# Altium PCB sigcarrier.PcbDoc
Units mil, origin at the board's own origin, x right, y up, seen from the top; angles counter-clockwise.
Board outline 3267.72 x 2322.83 mil, 2 copper layers (Top Layer, Bottom Layer), stack 47.8 mil thick; 178 components, 282 nets, 680 pads, 1 vias.
Unrouted connection lines stored in the file: 421.
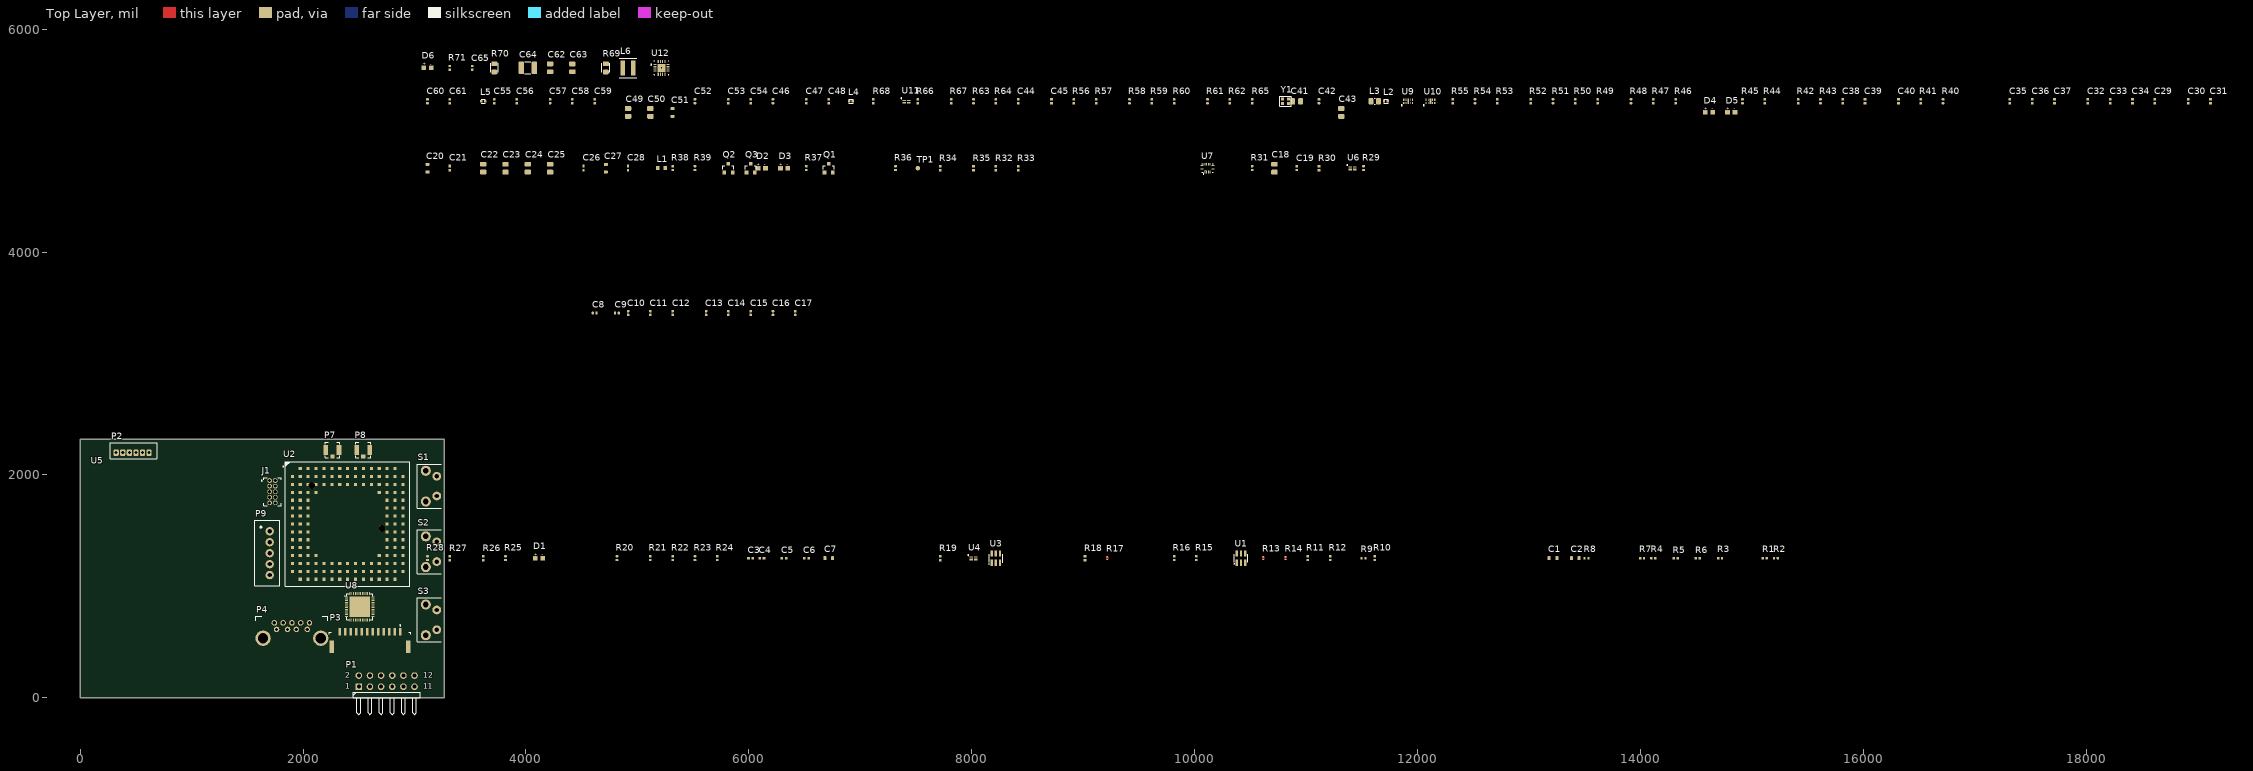
[diagram p0: Top Layer view]
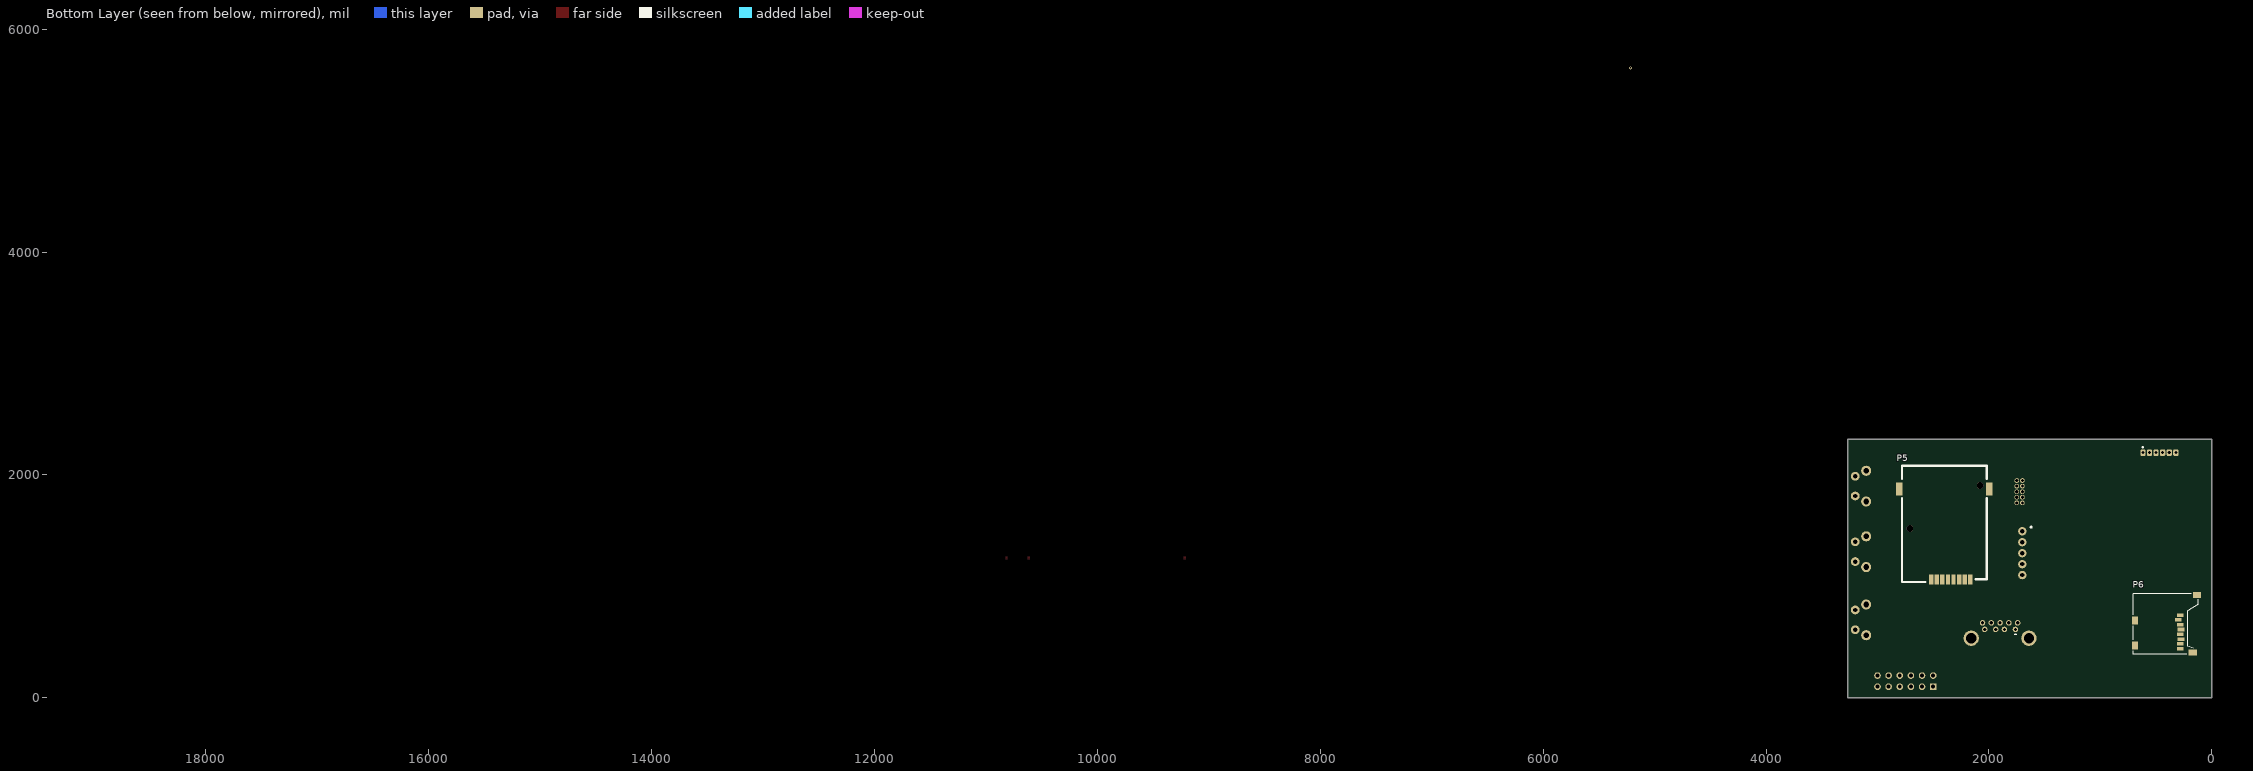
[diagram p1: Bottom Layer view, seen from below]

## Layer stack, top to bottom
Top Solder: solder mask 0.4, Solder Resist, Dk 3.5
Top Layer: signal copper 1.4
Dielectric1: core 45, FR-4, Dk 4.8
Bottom Layer: signal copper 1.4
Bottom Solder: solder mask 0.4, Solder Resist, Dk 3.5

## Board outline
0,0 3267.72,0 3267.72,2322.83 0,2322.83

## Design rules (kind name [scope] priority, off if disabled: settings)
Clearance [All] p1: gap=5 ignorepadtopadclearanceinfootprint=FALSE except(0: Arc-Hole Track-Hole SMDPad-Hole THPad-Hole Via-Hole Fill-Hole Poly-Hole Region-Hole Text-Hole)
ComponentClearance [All] p1 off: gap=10 collisioncheckmode=3 verticalgap=10 showdistances=FALSE
HoleSize [All] p1: absolutevalues=TRUE maxlimit=1000 minlimit=10 maxpercent=80.000 minpercent=20.000
PolygonConnect [All] p1: connectstyle=Direct reliefconductorwidth=10 reliefentries=4 polygonreliefangle="90 Angle" airgapwidth=10
RoutingVias [All] p1: holewidth=28 width=50 viastyle="Through Hole" minholewidth=28 minwidth=50 maxholewidth=28 maxwidth=50
SilkToSolderMaskClearance SilkscreenOverComponentPads [IsPad] p1: minsilkscreentomaskgap=10 clearancetoexposedcopper=TRUE
SolderMaskExpansion [All] p1: expansion=4
Width [All] p1: maxlimit=19685.04 minlimit=10 preferedwidth=10
27 further rules are at their usual default settings.

## Classes and differential pairs
net class USB: XUHOST1_DM XUHOST1_DP XUSB3_DM XUSB3_DP
net class RF: ANT_DIV ANTENNA
component class 05_power: C62 C63 C64 C65 D6 L6 R69 R70 R71 U12
component class 04_ethernet: C29 C30 C31 C32 C33 C34 C35 C36 C37 C38 C39 C40 C41 C42 C43 C44 C45 C46 C47 C48 C49 C50 C51 C52 C53 C54 C55 C56 C57 C58 C59 C60 C61 D4 D5 L2 L3 L4 L5 R40 R41 R42 R43 R44 R45 R46 R47 R48 R49 R50 R51 R52 R53 R54 R55 R56 R57 R58 R59 R60 R61 R62 R63 R64 R65 R66 R67 R68 T1 U8 U9 U10 U11 Y1
component class 03_cellular: C18 C19 C20 C21 C22 C23 C24 C25 C26 C27 C28 D2 D3 L1 P7 P8 Q1 Q2 Q3 R29 R30 R31 R32 R33 R34 R35 R36 R37 R38 R39 S3 TP1 U2 U6 U7
component class 02_som: C8 C9 C10 C11 C12 C13 C14 C15 C16 C17 U5
component class 01_main: C1 C2 C3 C4 C5 C6 C7 D1 J1 P1 P2 P3 P4 P5 P6 P9 R1 R2 R3 R4 R5 R6 R7 R8 R9 R10 R11 R12 R13 R14 R15 R16 R17 R18 R19 R20 R21 R22 R23 R24 R25 R26 R27 R28 S1 S2 U1 U3 U4

## Components (designator, comment, footprint, x,y, rotation, side; value= is the part's Value field where it differs from the comment)
C1 "C1608X7R1A105M080" CAPC160X80X90L20N 13216.53,1253.45 r0 top value=1uF
C2 "C1608X7R1A105M080" CAPC160X80X90L20N 13416.53,1253.45 r0 top value=1uF
C3 "CBR04C330F5GAC" 0402#1 6016.53,1253.45 r0 top value=33pF
C4 "CBR04C330F5GAC" 0402#1 6116.53,1253.45 r0 top value=33pF
C5 "CBR04C330F5GAC" 0402#1 6316.53,1253.45 r0 top value=33pF
C6 "CBR04C330F5GAC" 0402#1 6516.53,1253.45 r0 top value=33pF
C7 "C1608X7R1A225M080" CAPC160X80X90L20N 6716.53,1253.45 r0 top value=2.2uF
C8 "GCM155R71H104KE02" CAPC100X50X55L25N 4616.53,3453.45 r0 top value=100nF
C9 "GCM155R71H104KE02" CAPC100X50X55L25N 4816.53,3453.45 r0 top value=100nF
C10 "GCM155R71H104KE02" CAPC100X50X55L25N 4916.53,3453.45 r90 top value=100nF
C11 "GCM155R71H104KE02" CAPC100X50X55L25N 5116.53,3453.45 r90 top value=100nF
C12 "GCM155R71H104KE02" CAPC100X50X55L25N 5316.53,3453.45 r90 top value=100nF
C13 "GCM155R71H104KE02" CAPC100X50X55L25N 5616.53,3453.45 r90 top value=100nF
C14 "GCM155R71H104KE02" CAPC100X50X55L25N 5816.53,3453.45 r90 top value=100nF
C15 "GCM155R71H104KE02" CAPC100X50X55L25N 6016.53,3453.45 r90 top value=100nF
C16 "GCM155R71H104KE02" CAPC100X50X55L25N 6216.53,3453.45 r90 top value=100nF
C17 "GCM155R71H104KE02" CAPC100X50X55L25N 6416.53,3453.45 r90 top value=100nF
C18 "C2012X7S1A226M125" CAPC200X125X145L45N 10716.53,4753.45 r90 top value=22uF
C19 "GCM155R71H104KE02" CAPC100X50X55L25N 10916.53,4753.45 r90 top value=100nF
C20 "C1608X7R1A225M080" CAPC160X80X90L20N 3116.53,4753.45 r90 top value=2.2uF
C21 "CBR04C330F5GAC" 0402#1 3316.53,4753.45 r90 top value=33pF
C22 "C2012X7S1A226M125" CAPC200X125X145L45N 3616.53,4753.45 r90 top value=22uF
C23 "C2012X7S1A226M125" CAPC200X125X145L45N 3816.53,4753.45 r90 top value=22uF
C24 "C2012X7S1A226M125" CAPC200X125X145L45N 4016.53,4753.45 r90 top value=22uF
C25 "C2012X7S1A226M125" CAPC200X125X145L45N 4216.53,4753.45 r90 top value=22uF
C26 "CBR04C330F5GAC" 0402#1 4516.53,4753.45 r90 top value=33pF
C27 "C1608X7R1A225M080" CAPC160X80X90L20N 4716.53,4753.45 r90 top value=2.2uF
C28 "CBR04C330F5GAC" 0402#1 4916.53,4753.45 r90 top value=33pF
C29 "GRM155R71C104KA88J" 0402#2 18616.53,5353.45 r90 top value=100nF
C30 "GRM155R71E103KA01D" 0402#2 18916.53,5353.45 r90 top value=10nF
C31 "GRM1555C1H102JA01D" 0402#2 19116.53,5353.45 r90 top value=1nF
C32 "GRM155R71C104KA88J" 0402#2 18016.53,5353.45 r90 top value=100nF
C33 "GRM155R71E103KA01D" 0402#2 18216.53,5353.45 r90 top value=10nF
C34 "GRM1555C1H102JA01D" 0402#2 18416.53,5353.45 r90 top value=1nF
C35 "GRM155R71C104KA88J" 0402#2 17316.53,5353.45 r90 top value=100nF
C36 "GRM155R71E103KA01D" 0402#2 17516.53,5353.45 r90 top value=10nF
C37 "GRM1555C1H102JA01D" 0402#2 17716.53,5353.45 r90 top value=1nF
C38 "GRM155R71C104KA88J" 0402#2 15816.53,5353.45 r90 top value=100nF
C39 "GRM155R71E103KA01D" 0402#2 16016.53,5353.45 r90 top value=10nF
C40 "GRM1555C1H102JA01D" 0402#2 16316.53,5353.45 r90 top value=1nF
C41 "C2012X7S1A226M125" CAPC200X125X145L45N 10916.53,5353.45 r0 top value=22uF
C42 "GCM155R71H104KE02" CAPC100X50X55L25N 11116.53,5353.45 r90 top value=100nF
C43 "C2012X7S1A226M125" CAPC200X125X145L45N 11316.53,5253.45 r90 top value=22uF
C44 "GJM1555C1H6R0CB01D" 0402#2 8416.53,5353.45 r90 top value=6pF
C45 "GJM1555C1H6R0CB01D" 0402#2 8716.53,5353.45 r90 top value=6pF
C46 "GCM155R71H104KE02" CAPC100X50X55L25N 6216.53,5353.45 r90 top value=100nF
C47 "GCM155R71H104KE02" CAPC100X50X55L25N 6516.53,5353.45 r90 top value=100nF
C48 "GCM155R71H104KE02" CAPC100X50X55L25N 6716.53,5353.45 r90 top value=100nF
C49 "C2012X7S1A226M125" CAPC200X125X145L45N 4916.53,5253.45 r90 top value=22uF
C50 "C2012X7S1A226M125" CAPC200X125X145L45N 5116.53,5253.45 r90 top value=22uF
C51 "C1608X7R1A225M080" CAPC160X80X90L20N 5316.53,5253.45 r90 top value=2.2uF
C52 "GCM155R71H104KE02" CAPC100X50X55L25N 5516.53,5353.45 r90 top value=100nF
C53 "GCM155R71H104KE02" CAPC100X50X55L25N 5816.53,5353.45 r90 top value=100nF
C54 "GRM155R71H103KA88" CAPC100X50X55L25N 6016.53,5353.45 r90 top value=10nF
C55 "GCM155R71H104KE02" CAPC100X50X55L25N 3716.53,5353.45 r90 top value=100nF
C56 "GCM155R71H104KE02" CAPC100X50X55L25N 3916.53,5353.45 r90 top value=100nF
C57 "GCM155R71H104KE02" CAPC100X50X55L25N 4216.53,5353.45 r90 top value=100nF
C58 "GCM155R71H104KE02" CAPC100X50X55L25N 4416.53,5353.45 r90 top value=100nF
C59 "GCM155R71H104KE02" CAPC100X50X55L25N 4616.53,5353.45 r90 top value=100nF
C60 "GCM155R71H104KE02" CAPC100X50X55L25N 3116.53,5353.45 r90 top value=100nF
C61 "GCM155R71H104KE02" CAPC100X50X55L25N 3316.53,5353.45 r90 top value=100nF
C62 "C2012X7S1A226M125" CAPC200X125X145L45N 4216.53,5653.45 r90 top value=22uF
C63 "C2012X7S1A226M125" CAPC200X125X145L45N 4416.53,5653.45 r90 top value=22uF
C64 "GRM32ER71E226KE15" CAPC320X250X270L50N 4016.53,5653.45 r0 top value=22uF
C65 "GRM155R71H103KA88" CAPC100X50X55L25N 3516.53,5653.45 r90 top value=10nF
D1 "LNJ237W82RA" 0603_LED 4116.53,1253.45 r0 top
D2 "LNJ937W8CRA" 0603_LED 6116.53,4753.45 r0 top
D3 "LNJ237W82RA" 0603_LED 6316.53,4753.45 r0 top
D4 "LNJ412K84RA" 0603_LED 14616.53,5253.45 r0 top
D5 "LNJ326W83RA" 0603_LED 14816.53,5253.45 r0 top
D6 "LNJ237W82RA" 0603_LED 3116.53,5653.45 r0 top
J1 "GRPB052VWVN" GRPB052VWVN 1725,1850 r0 top
L1 "BLM15PX601SN1D" 0603 5216.53,4753.45 r0 top value=100@100MHz
L2 "BLM15PX601SN1D" INDC1005X55N 11716.53,5353.45 r0 top value=600@100MHz
L3 "CIG21L4R7MNE" INDC200X125X105L50N 11616.53,5353.45 r0 top value=4.7uH
L4 "BLM15PX601SN1D" INDC1005X55N 6916.53,5353.45 r0 top value=600@100MHz
L5 "BLM15PX601SN1D" INDC1005X55N 3616.53,5353.45 r0 top value=600@100MHz
L6 "XFL4020-222ME" XFL4020 4916.53,5653.45 r0 top value=2.2uH
P1 "PEC06DBAN" HDR2X6H 2500,100 r0 top
P2 "B6B-ZR" B6B-ZR 470.47,2217.72 r0 top
P3 "BM12B-GHS-TBT" BM12B-GHS-TBT 2600,500 r180 top
P4 "10117835-001LF" 10117835-001LF 1900,400 r0 top
P5 "47553-2001" 47553-2001 2400,1560.63 r90 bottom
P6 "101-00581-59" 101-00581-59 170.08,896.85 r270 bottom
P7 "U.FL-R-SMT(10)" U.FL-R-SMT(10) 2263.78,2224.41 r180 top
P8 "U.FL-R-SMT(10)" U.FL-R-SMT(10) 2539.37,2224.41 r180 top
P9 "B5B-XH-A" B5B-XH-A 1679.33,1298.43 r270 top
Q1 "MMBT4401-7-F" SOT23 6716.53,4753.45 r0 top
Q2 "MMBT4401-7-F" SOT23 5816.53,4753.45 r0 top
Q3 "MMBT4401-7-F" SOT23 6016.53,4753.45 r0 top
R1 "ERJ-2RKF4702X" RESC1005X40N 15116.53,1253.45 r0 top value=47k
R2 "ERJ-2RKF4702X" RESC1005X40N 15216.53,1253.45 r0 top value=47k
R3 "ERJ-2RKF1001X" RESC1005X40N 14716.53,1253.45 r0 top value=1k
R4 "ERJ-2RKF1001X" RESC1005X40N 14116.53,1253.45 r0 top value=1k
R5 "RC0402FR-0720L" 0402#2 14316.53,1253.45 r0 top value=20
R6 "RC0402FR-0720L" 0402#2 14516.53,1253.45 r0 top value=20
R7 "ERJ-2RKF1001X" RESC1005X40N 14016.53,1253.45 r0 top value=1k
R8 "ERJ-2RKF1001X" RESC1005X40N 13516.53,1253.45 r0 top value=1k
R9 "ERJ-2RKF2400X" RESC1005X40N 11516.53,1253.45 r0 top value=240
R10 "ERJ-2RKF2400X" RESC1005X40N 11616.53,1253.45 r90 top value=240
R11 "ERJ-2RKF2400X" RESC1005X40N 11016.53,1253.45 r90 top value=240
R12 "ERJ-2RKF2400X" RESC1005X40N 11216.53,1253.45 r90 top value=240
R13 "SOLDER_LINK" SOLDERLINK0603X26N 10616.53,1253.45 r90 top
R14 "SOLDER_LINK" SOLDERLINK0603X26N 10816.53,1253.45 r90 top
R15 "ERJ-2RKF2400X" RESC1005X40N 10016.53,1253.45 r90 top value=240
R16 "ERJ-2RKF2400X" RESC1005X40N 9816.53,1253.45 r90 top value=240
R17 "SOLDER_LINK" SOLDERLINK0603X26N 9216.53,1253.45 r90 top
R18 "RC0402FR-0720L" 0402#2 9016.53,1253.45 r90 top value=20
R19 "RC0402FR-0720L" 0402#2 7716.53,1253.45 r90 top value=20
R20 "ERJ-2RKF1002X" RESC1005X40N 4816.53,1253.45 r90 top value=10k
R21 "ERJ-2RKF4702X" RESC1005X40N 5116.53,1253.45 r90 top value=47k
R22 "ERJ-2RKF4702X" RESC1005X40N 5316.53,1253.45 r90 top value=47k
R23 "ERJ-2RKF4702X" RESC1005X40N 5516.53,1253.45 r90 top value=47k
R24 "ERJ-2RKF4702X" RESC1005X40N 5716.53,1253.45 r90 top value=47k
R25 "ERJ-2RKF2400X" RESC1005X40N 3816.53,1253.45 r90 top value=240
R26 "RC0402FR-0720L" 0402#2 3616.53,1253.45 r90 top value=20
R27 "RC0402FR-0720L" 0402#2 3316.53,1253.45 r90 top value=20
R28 "ERJ-2RKF1002X" RESC1005X40N 3116.53,1253.45 r90 top value=10k
R29 "ERJ-2RKF4701X" RESC1005X40N 11516.53,4753.45 r90 top value=4.7k
R30 "RC0402FR-0720L" 0402#2 11116.53,4753.45 r90 top value=20
R31 "ERJ-2RKF4702X" RESC1005X40N 10516.53,4753.45 r90 top value=47k
R32 "RC0402FR-0720L" 0402#2 8216.53,4753.45 r90 top value=20
R33 "RC0402FR-0720L" 0402#2 8416.53,4753.45 r90 top value=20
R34 "RC0402FR-0720L" 0402#2 7716.53,4753.45 r90 top value=20
R35 "RC0402FR-0720L" 0402#2 8016.53,4753.45 r90 top value=20
R36 "ERJ-2RKF1002X" RESC1005X40N 7316.53,4753.45 r90 top value=10k
R37 "ERJ-2RKF4702X" RESC1005X40N 6516.53,4753.45 r90 top value=47k
R38 "ERJ-2RKF2400X" RESC1005X40N 5316.53,4753.45 r90 top value=240
R39 "ERJ-2RKF2400X" RESC1005X40N 5516.53,4753.45 r90 top value=240
R40 "ERJ-2RKF20R0X" RESC1005X40N 16716.53,5353.45 r90 top value=20
R41 "ERJ-2RKF20R0X" RESC1005X40N 16516.53,5353.45 r90 top value=20
R42 "ERJ-2RKF2400X" RESC1005X40N 15416.53,5353.45 r90 top value=240
R43 "ERJ-2RKF2400X" RESC1005X40N 15616.53,5353.45 r90 top value=240
R44 "ERJ-2RKF20R0X" RESC1005X40N 15116.53,5353.45 r90 top value=20
R45 "ERJ-2RKF20R0X" RESC1005X40N 14916.53,5353.45 r90 top value=20
R46 "ERJ-2RKF20R0X" RESC1005X40N 14316.53,5353.45 r90 top value=20
R47 "ERJ-2RKF20R0X" RESC1005X40N 14116.53,5353.45 r90 top value=20
R48 "ERJ-2RKF20R0X" RESC1005X40N 13916.53,5353.45 r90 top value=20
R49 "ERJ-2RKF20R0X" RESC1005X40N 13616.53,5353.45 r90 top value=20
R50 "ERJ-2RKF20R0X" RESC1005X40N 13416.53,5353.45 r90 top value=20
R51 "ERJ-2RKF20R0X" RESC1005X40N 13216.53,5353.45 r90 top value=20
R52 "ERJ-2RKF20R0X" RESC1005X40N 13016.53,5353.45 r90 top value=20
R53 "ERJ-2RKF20R0X" RESC1005X40N 12716.53,5353.45 r90 top value=20
R54 "ERJ-2RKF20R0X" RESC1005X40N 12516.53,5353.45 r90 top value=20
R55 "ERJ-2RKF20R0X" RESC1005X40N 12316.53,5353.45 r90 top value=20
R56 "ERJ-2RKF1501X" RESC1005X40N 8916.53,5353.45 r90 top value=1.5k
R57 "ERJ-2RKF4701X" RESC1005X40N 9116.53,5353.45 r90 top value=4.7k
R58 "ERJ-2RKF4701X" RESC1005X40N 9416.53,5353.45 r90 top value=4.7k
R59 "ERJ-2RKF4701X" RESC1005X40N 9616.53,5353.45 r90 top value=4.7k
R60 "ERJ-2RKF4701X" RESC1005X40N 9816.53,5353.45 r90 top value=4.7k
R61 "ERJ-2RKF4701X" RESC1005X40N 10116.53,5353.45 r90 top value=4.7k
R62 "ERJ-2RKF4701X" RESC1005X40N 10316.53,5353.45 r90 top value=4.7k
R63 "ERJ-2RKF4701X" RESC1005X40N 8016.53,5353.45 r90 top value=4.7k
R64 "ERJ-2RKF4701X" RESC1005X40N 8216.53,5353.45 r90 top value=4.7k
R65 "RC0402FR-0720L" 0402#2 10516.53,5353.45 r90 top value=20
R66 "ERJ-2RKF2491X" RESC1005X40N 7516.53,5353.45 r90 top value=2.49k
R67 "ERJ-2RKF4701X" RESC1005X40N 7816.53,5353.45 r90 top value=4.7k
R68 "RC0402FR-0720L" 0402#2 7116.53,5353.45 r90 top value=20
R69 "ERA-6AEB3162V" RESC2012X70N 4716.53,5653.45 r90 top value=31.6k
R70 "ERA-6AEB103V" RESC2012X70N 3716.53,5653.45 r90 top value=10k
R71 "ERJ-2RKF1001X" RESC1005X40N 3316.53,5653.45 r90 top value=1k
S1 "EVQ-PF006K" EVQ-PF006K 3200,1900 r90 top
S2 "EVQ-PF006K" EVQ-PF006K 3200,1311.42 r90 top
S3 "EVQ-PF006K" EVQ-PF006K 3200,700 r90 top
TP1 "TEST_POINT_SMD_10" TEST_POINT_SMD_10 7516.53,4753.45 r90 top
U1 "NUP4301MR6" SOT23-6 10416.53,1253.45 r0 top
U2 "LE910NAG703T701" LGA144S180P15X15_2820X2820X225_LE910NAG703T701(Primary) 2400,1560.63 r0 top
U3 "NUP4301MR6" SOT23-6 8216.53,1253.45 r0 top
U4 "SLG59M1440V" SLG59M1440V 8016.53,1253.45 r0 top
U5 "ARTIK_710_LGA_PAD" ARTIK_LGA_PAD_10 800,1100 r0 top
U6 "SLG59M1440V" SLG59M1440V 11416.53,4753.45 r0 top
U7 "SN74AVC4T774RSVR" RSV 10116.53,4753.45 r0 top
U8 "RTL8211E-VB-CG" QFN48 2507.87,818.11 r0 top
U9 "AOZ8804A" AOZ8804 11916.53,5353.45 r0 top
U10 "AOZ8804A" AOZ8804 12116.53,5353.45 r0 top
U11 "SLG59M1440V" SLG59M1440V 7416.53,5353.45 r0 top
U12 "TPS62130RGT" S-PQFP-8N 5216.53,5653.45 r0 top
Y1 "XRCGB25M000F3N00R0" XRCGB 10816.53,5353.45 r0 top

## Footprints (in the part's own frame and the unit in brackets; to place one, negate y for a bottom-side part, rotate by r counter-clockwise, add the part's x,y. Pads: shape width x height; smd on the part's side, far side on the other; paste and mask are expansions set on the pad)
101-00581-59 [mm] "MicroSD PCB mount"
  rect 0.8x1.5 smd mask+0.051: 1(3.9,-2.9) 2(5,-3.3) 3(6.1,-2.9) 4(7.2,-2.7) 5(8.3,-2.9) 6(9.4,-2.7) 7(10.5,-2.9) 8(11.6,-2.9)
  rect 1.4x1.9 smd: 9(-0.7,0.95) 11(12.45,0)
  rect 1.8x1.4 smd: 10(5.15,-13.2) 10(10.85,-13.2)
  silkscreen extent -1,-13.6 12.8,1.2, body extent -1.15,-13.75 12.95,1.66, height 1.85
0402#1 [mm] "Chip Capacitor, Body 1.0x0.5mm, IPC High Density"
  rect 0.6x0.5 smd: 1(-0.5,0) 2(0.5,0)
  body extent -0.55,-0.3 0.55,0.3, height 1.3
0402#2 [mm] "SMD; Body 1 x 0.5 mm (LxW typ)"
  rect 0.59x0.6 smd: 1(-0.455,0) 2(0.455,0)
  body extent -0.5,-0.25 0.5,0.25, height 0.6
0603 [mm] "SMD; Body 1.6 x 0.9 mm (LxW typ)"
  rect 0.79x0.93 smd: 1(-0.82,0) 2(0.82,0)
  body extent -0.8,-0.4 0.8,0.4, height 0.9
0603_LED [mm] "SMD; Body 1.6 x 0.9 mm (LxW typ)"
  rect 1.1x1 smd: 1(-0.85,0) 2(0.85,0)
  body extent -0.8,-0.4 0.8,0.4, height 0.9
47553-2001 [mm] "1.27mm pitch SIM Card Holder"
  rect 2.3x1 smd: C1(-12.7,2.985) C2(-12.7,0.445) C3(-12.7,-2.095) C5(-12.7,1.715) C6(-12.7,-0.825) C7(-12.7,-3.365) D1(-12.7,-4.635) D2(-12.7,-5.905)
  rect 2.95x1.5 smd: T1(8,10.275) T2(8,-10.275)
  round 1.5 hole 1.5 unplated paste-1.5 mask+0.25: ""(-1.03,7.885) ""(8.77,-8.165)
  silkscreen extent -13.25,-9.67 13.25,9.67, body extent -13.25,-10.42 13.25,10.53, height 1.83
10117835-001LF [mm] "USB 3.0 Standard-A Receptacle Right-Angle"
  round 1.25 hole 0.75: 1(-3.5,5.43) 2(-1,5.43) 3(1,5.43) 4(3.5,5.43) 5(4,6.93) 6(2,6.93) 7(0,6.93) 8(-2,6.93) 9(-4,6.93)
  round 3.5 hole 2.3: 10(-6.57,3.43) 11(6.57,3.43)
  silkscreen extent -8.2,7.4 8.2,8.4, body extent -7.79,-8.48 7.79,8.05, height 7.66
AOZ8804 [mm]
  rect 0.3x0.48 smd: 1(-1,-0.36) 5(1,-0.36) 6(1,0.36) 10(-1,0.36)
  rect 0.15x0.48 smd: 2(-0.5,-0.36) 4(0.5,-0.36) 7(0.5,0.36) 9(-0.5,0.36)
  rect 0.4x0.6 smd: 3(0,-0.3) 8(0,0.3)
  silkscreen extent -1.62,-1.02 -1.37,-0.78, body extent -1.25,-0.5 1.25,0.5, height 0.55
ARTIK_LGA_PAD_10 [mil] "ARTIK 710 System on Module"
  body extent -709,-965 709,965, height 136
B5B-XH-A [mm] "Through-hole shrouded header, 2.5mm pitch, 5-pos"
  round 1.905 hole 0.965: 1(-5,0.525) 2(-2.5,0.525) 3(0,0.525) 4(2.5,0.525) 5(5,0.525)
  silkscreen extent -7.45,-2.88 7.45,2.88, body extent -7.45,-2.85 7.45,2.9, height 7
B6B-ZR [mm]
  rrect50% 1.2x1.5 hole 0.7 paste-1.5 mask+0.05: 1(3.75,-0.45) 2(2.25,-0.45) 3(0.75,-0.45) 4(-0.75,-0.45) 5(-2.25,-0.45) 6(-3.75,-0.45)
  silkscreen extent -5.1,-1.85 5.6,1.85, body extent -5,-1.75 5.5,1.75, height 4.5
BM12B-GHS-TBT [mm] "Top Entry Shrouded Connector"
  rect 0.6x1.7 smd: 1(-6.875,-2.375) 2(-5.625,-2.375) 3(-4.375,-2.375) 4(-3.125,-2.375) 5(-1.875,-2.375) 6(-0.625,-2.375) 7(0.625,-2.375) 8(1.875,-2.375) 9(3.125,-2.375) 10(4.375,-2.375) 11(5.625,-2.375) 12(6.875,-2.375)
  rect 1x2.8 smd: 13(8.697,1.075) 14(-8.697,1.075)
  silkscreen extent -9.3,-3.93 9.3,-1.8, body extent -9.13,-2.83 9.12,2.12, height 4.2
CAPC100X50X55L25N [mm] "Capacitor, Chip; 1.00 mm L X 0.50 mm W X 0.55 mm H body"
  rrect52% 0.54x0.6 smd: 1(-0.43,0) 2(0.43,0)
  body extent -0.5,-0.25 0.5,0.25, height 0.55
CAPC160X80X90L20N [mm] "Capacitor, Chip; 1.60 mm L X 0.80 mm W X 0.90 mm H body"
  rrect50% 0.68x0.93 smd: 1(-0.875,0) 2(0.875,0)
  body extent -0.8,-0.4 0.8,0.4, height 0.9
CAPC200X125X145L45N [mm] "Capacitor, Chip; 2.00 mm L X 1.25 mm W X 1.45 mm H body"
  rrect45% 1.11x1.47 smd: 1(-0.9,0) 2(0.9,0)
  body extent -1,-0.63 1,0.63, height 1.45
CAPC320X250X270L50N [mm] "Capacitor, Chip; 3.20 mm L X 2.50 mm W X 2.70 mm H body"
  rrect38% 1.32x2.81 smd: 1(-1.49,0) 2(1.49,0)
  silkscreen extent -0.66,-1.4 0.66,1.4, body extent -1.6,-1.25 1.6,1.25, height 2.7
EVQ-PF006K [mm] "Light Touch Switch"
  round 2 hole 1: 1(-2.25,0) 2(2.25,0)
  round 2.3 hole 1.3: 3(-3.5,2.5) 3(3.5,2.5)
  silkscreen extent -5,-1 5,4.5, body extent -4.29,-5.85 4.29,4, height 7.4
GRPB052VWVN [mil] "Male Header, 0.050\" Pitch, 2x5 Position"
  round 42 hole 28 mask+2: 1(-25,100) 2(25,100) 3(-25,50) 4(25,50) 5(-25,0) 6(25,0) 7(-25,-50) 8(25,-50) 9(-25,-100) 10(25,-100)
  silkscreen extent -100,-125 77,125, body extent -67,-125 67,125, height 157
HDR2X6H [mm] "Connector; Header; 6x2 Position; Right Angle"
  rect 1.5x1.5 hole 0.9: 1(0,0)
  round 1.5 hole 0.9: 2(0,2.54) 3(2.54,0) 4(2.54,2.54) 5(5.08,0) 6(5.08,2.54) 7(7.62,0) 8(7.62,2.54) 9(10.16,0) 10(10.16,2.54) 11(12.7,0) 12(12.7,2.54)
  silkscreen extent -1.27,-6.35 13.97,-1.27
INDC200X125X105L50N [mm] "Inductor, Chip; 2.00 mm L X 1.25 mm W X 1.05 mm H body"
  rrect46% 1.09x1.47 smd: 1(-0.865,0) 2(0.865,0)
  silkscreen extent -0.14,-0.73 0.14,0.73
INDC1005X55N [mm] "Inductor, Chip; 1.00 mm L X 0.50 mm W X 0.55 mm H body"
  rrect50% 0.54x0.6 smd mask+0.075: 1(-0.43,0) 2(0.43,0)
  silkscreen extent -0.5,-0.48 0.5,0.48, body extent -0.5,-0.25 0.5,0.25, height 0.55
LGA144S180P15X15_2820X2820X225_LE910NAG703T701(Primary) [mm]
  rect 0.7x0.7 smd: A2(-12.6,10.8) A3(-12.6,9) A4(-12.6,7.2) A5(-12.6,5.4) A6(-12.6,3.6) A7(-12.6,1.8) A8(-12.6,0) A9(-12.6,-1.8) A10(-12.6,-3.6) A11(-12.6,-5.4) A12(-12.6,-7.2) A13(-12.6,-9) A14(-12.6,-10.8) B1(-10.8,12.6) B2(-10.8,10.8) B3(-10.8,9) B4(-10.8,7.2) B5(-10.8,5.4) B6(-10.8,3.6) B7(-10.8,1.8) B8(-10.8,0) B9(-10.8,-1.8) B10(-10.8,-3.6) B11(-10.8,-5.4) B12(-10.8,-7.2) B13(-10.8,-9) B14(-10.8,-10.8) B15(-10.8,-12.6) C1(-9,12.6) C2(-9,10.8) C3(-9,9) C4(-9,7.2) C5(-9,5.4) C6(-9,3.6) C7(-9,1.8) C8(-9,0) C9(-9,-1.8) C10(-9,-3.6) C11(-9,-5.4) C12(-9,-7.2) C13(-9,-9) C14(-9,-10.8) C15(-9,-12.6) D1(-7.2,12.6) D2(-7.2,10.8) D3(-7.2,9) D4(-7.2,7.2) D12(-7.2,-7.2) D13(-7.2,-9) D14(-7.2,-10.8) D15(-7.2,-12.6) E1(-5.4,12.6) E2(-5.4,10.8) E3(-5.4,9) E13(-5.4,-9) E14(-5.4,-10.8) E15(-5.4,-12.6) F1(-3.6,12.6) F2(-3.6,10.8) F3(-3.6,9) F13(-3.6,-9) F14(-3.6,-10.8) F15(-3.6,-12.6) G1(-1.8,12.6) G2(-1.8,10.8) G3(-1.8,9) G13(-1.8,-9) G14(-1.8,-10.8) G15(-1.8,-12.6) H1(0,12.6) H2(0,10.8) H3(0,9) H13(0,-9) H14(0,-10.8) H15(0,-12.6) J1(1.8,12.6) J2(1.8,10.8) J3(1.8,9) J13(1.8,-9) J14(1.8,-10.8) J15(1.8,-12.6) K1(3.6,12.6) K2(3.6,10.8) K3(3.6,9) K13(3.6,-9) K14(3.6,-10.8) K15(3.6,-12.6) L1(5.4,12.6) L2(5.4,10.8) L3(5.4,9) L13(5.4,-9) L14(5.4,-10.8) L15(5.4,-12.6) M1(7.2,12.6) M2(7.2,10.8) M3(7.2,9) M4(7.2,7.2) M12(7.2,-7.2) M13(7.2,-9) M14(7.2,-10.8) M15(7.2,-12.6) N1(9,12.6) N2(9,10.8) N3(9,9) N4(9,7.2) N5(9,5.4) N6(9,3.6) N7(9,1.8) N8(9,0) N9(9,-1.8) N10(9,-3.6) N11(9,-5.4) N12(9,-7.2) N13(9,-9) N14(9,-10.8) N15(9,-12.6) P1(10.8,12.6) P2(10.8,10.8) P3(10.8,9) P4(10.8,7.2) P5(10.8,5.4) P6(10.8,3.6) P7(10.8,1.8) P8(10.8,0) P9(10.8,-1.8) P10(10.8,-3.6) P11(10.8,-5.4) P12(10.8,-7.2) P13(10.8,-9) P14(10.8,-10.8) P15(10.8,-12.6) R2(12.6,10.8) R3(12.6,9) R4(12.6,7.2) R5(12.6,5.4) R6(12.6,3.6) R7(12.6,1.8) R8(12.6,0) R9(12.6,-1.8) R10(12.6,-3.6) R11(12.6,-5.4) R12(12.6,-7.2) R13(12.6,-9) R14(12.6,-10.8)
  silkscreen extent -14.8,-14.2 14.2,14.2
QFN48 [mm]
  rect 0.65x0.2 smd mask+0.05: 1(-3,2.2) 2(-3,1.8) 3(-3,1.4) 4(-3,1) 5(-3,0.6) 6(-3,0.2) 7(-3,-0.2) 8(-3,-0.6) 9(-3,-1) 10(-3,-1.4) 11(-3,-1.8) 12(-3,-2.2) 25(3,-2.2) 26(3,-1.8) 27(3,-1.4) 28(3,-1) 29(3,-0.6) 30(3,-0.2) 31(3,0.2) 32(3,0.6) 33(3,1) 34(3,1.4) 35(3,1.8) 36(3,2.2)
  rect 0.2x0.65 smd mask+0.05: 13(-2.2,-3) 14(-1.8,-3) 15(-1.4,-3) 16(-1,-3) 17(-0.6,-3) 18(-0.2,-3) 19(0.2,-3) 20(0.6,-3) 21(1,-3) 22(1.4,-3) 23(1.8,-3) 24(2.2,-3) 37(2.2,3) 38(1.8,3) 39(1.4,3) 40(1,3) 41(0.6,3) 42(0.2,3) 43(-0.2,3) 44(-0.6,3) 45(-1,3) 46(-1.4,3) 47(-1.8,3) 48(-2.2,3)
  rect 4.67x4.67 smd: 49(0,0)
  silkscreen extent -3.45,-3 3,3
RESC1005X40N [mm] "Resistor, Chip; 1.00 mm L X 0.50 mm W X 0.40 mm H body"
  rrect50% 0.51x0.6 smd: 1(-0.445,0) 2(0.445,0)
  body extent -0.5,-0.25 0.5,0.25, height 0.4
RESC2012X70N [mm] "Resistor, Chip; 2.00 mm L X 1.25 mm W X 0.70 mm H body"
  rrect50% 1.04x1.38 smd: 1(-0.94,0) 2(0.94,0)
  silkscreen extent -1,-0.87 1,0.87, body extent -1,-0.63 1,0.63, height 0.7
RSV [mm] "QFN, 16-Leads, Body 1.9x2.7mm (max), Pitch 0.40mm, IPC High Density"
  rect 0.19x0.75 smd paste+0 mask+0.05: 1(-0.6,-0.825)
  rect 0.19x0.65 smd paste+0 mask+0.05: 2(-0.2,-0.875) 3(0.2,-0.875) 4(0.6,-0.875) 9(0.6,0.875) 10(0.2,0.875) 11(-0.2,0.875) 12(-0.6,0.875)
  rect 0.65x0.19 smd paste+0 mask+0.05: 5(1.275,-0.6) 6(1.275,-0.2) 7(1.275,0.2) 8(1.275,0.6) 13(-1.275,0.6) 14(-1.275,0.2) 15(-1.275,-0.2) 16(-1.275,-0.6)
  silkscreen extent -1.35,-1.36 1.35,0.95, body extent -1.32,-0.92 1.33,0.92, height 0.55
S-PQFP-8N [mm] "Plastic Quad Flatpack No-Lead"
  rect 0.7x0.25 smd paste-0.025: 1(-1.45,0.75) 2(-1.45,0.25) 3(-1.45,-0.25) 4(-1.45,-0.75) 9(1.45,-0.75) 10(1.45,-0.25) 11(1.45,0.25) 12(1.45,0.75)
  rect 0.25x0.7 smd paste-0.025: 5(-0.75,-1.45) 6(-0.25,-1.45) 7(0.25,-1.45) 8(0.75,-1.45) 13(0.75,1.45) 14(0.25,1.45) 15(-0.25,1.45) 16(-0.75,1.45)
  rect 1.8x1.8 smd paste-0.025: 17(0,0)
  silkscreen extent -2.47,-1.6 1.6,1.6, body extent -1.58,-1.59 1.58,1.59, height 1
SLG59M1440V [mm] "Ridiculously Small High-Side Power Switch"
  rect 0.8x0.2 smd paste-0.025 mask+0.075: 1(-0.52,0.22) 4(0.52,0.22)
  rect 0.8x0.39 smd paste-0.025 mask+0.075: 2(-0.52,-0.305) 3(0.52,-0.305)
  silkscreen extent -1.3,0.6 -1.1,0.8, body extent -0.5,-0.5 0.5,0.5, height 0.55
SOLDERLINK0603X26N [mm] "Resistor, Chip; 0.60 mm L X 0.30 mm W X 0.26 mm H body"
  rrect50% 0.27x0.4 smd paste-0.4 mask+0.05: 1(-0.335,0)
  rrect50% 0.37x0.4 smd paste-0.4 mask+0.05: 2(0.285,0)
  Top Layer region: 0.138,0.2 0.012,0 0.138,-0.2 0.298,-0.2 0.298,0.2
  Top Layer region: 0.013,-0.2 -0.112,0 0.013,0.2 -0.298,0.2 -0.298,-0.2
SOT23 [mm] "SOT-23; 3 Leads; Body 3.0 x 2.5 mm, inc. leads (LxW max)"
  rect 0.8x0.9 smd: 1(-0.95,-1) 2(0.95,-1) 3(0,1)
  silkscreen extent -1.27,-0.2 1.28,0.6, body extent -1.46,-1.14 1.46,1.2, height 1
SOT23-6 [mm] "SOT-457/SC-74; 6 Leads; Body 3 x 3 mm, inc. leads (LxW max)"
  rect 0.55x1.45 smd: 1(-0.95,-1.075) 2(0,-1.075) 3(0.95,-1.075) 4(0.95,1.075) 5(0,1.075) 6(-0.95,1.075)
  silkscreen extent -1.57,-1.35 1.55,0.9, body extent -1.5,-1.5 1.5,1.5, height 1.3
TEST_POINT_SMD_10 [mm] "Surface Mount Test Pad"
  round 1 smd paste-1 mask-0.076: 1(0,0)
U.FL-R-SMT(10) [mm] "HIROSE U.FL-R-SMT(01)"
  rect 1x1 smd: 1(0,1.5)
  rect 1.05x2.2 smd: 2(-1.5,0) 2(1.5,0)
  silkscreen extent -1.7,-1.8 1.7,1.8, body extent -1.5,-1.55 1.5,1.55, height 1.25
XFL4020 [mm] "Shielded Power Inductor"
  rect 0.98x3.4 smd paste-0.2: 1(-1.185,0) 2(1.185,0)
  silkscreen extent -2,-2.2 2,2.2, body extent -2,-2 2,2, height 2.1
XRCGB [mm] "Crystal package, 2.0x1.6mm"
  rect 0.75x0.7 smd: 1(0.675,0.5) 2(-0.675,0.5) 3(-0.675,-0.5) 4(0.675,-0.5)
  silkscreen extent -1.3,-1.1 1.3,1.1, body extent -1,-0.8 1,0.8, height 0.7

## Part data
C1 C2: library part CAP, "Ceramic Capacitor 1uF ±20% 10V X7R 0603", Manufacturer=TDK, Package=0603, Tolerance=±20%, Voltage=10V, Manufacturer P/N=C1608X7R1A105M080, Tr=-55:125
C3 C4 C5 C6 C21 C26 C28: library part "CAP 0603", "Ceramic Capacitor 33pF ±1% 50V NP0 0402", Manufacturer=Kemet, Package=0402, Tolerance=±1%, Voltage=50V, Manufacturer P/N=CBR04C330F5GAC, Tr=-55:125
C7 C20 C27 C51: library part CAP, "Ceramic Capacitor 2.2uF ±20% 10V X7R 0603", Manufacturer=TDK, Package=0603, Tolerance=±20%, Voltage=10V, Manufacturer P/N=C1608X7R1A225M080, Tr=-55:125
C8 C9 C10 C11 C12 C13 C14 C15 C16 C17 C19 C42 C46 C47 C48 C52 C53 C55 C56 C57 C58 C59 C60 C61: library part CAP, "Ceramic Capacitor 100nF ±10% 50V X7R 0402", Manufacturer=Murata, Package=0402, Tolerance=±10%, Voltage=50V, Manufacturer P/N=GCM155R71H104KE02, Tr=-55:125
C18 C22 C23 C24 C25 C41 C43 C49 C50 C62 C63: library part CAP, "Ceramic Capacitor 22uF ±20% 10V X7S 0805", Manufacturer=TDK, Package=0805, Tolerance=±20%, Voltage=10V, Manufacturer P/N=C2012X7S1A226M125, Tr=-55:125
C29 C32 C35 C38: library part "CAP 0402", "Ceramic Capacitor 100nF ±10% 16V X7R 0402", Manufacturer=Murata, Package=0402, Tolerance=±10%, Voltage=16V, Manufacturer P/N=GRM155R71C104KA88J, Tr=-55:125
C30 C33 C36 C39: library part "CAP 0402", "Ceramic Capacitor 10nF ±10% 25V X7R 0402", Manufacturer=Murata, Package=0402, Tolerance=±10%, Voltage=25V, Manufacturer P/N=GRM155R71E103KA01D, Tr=-55:125
C31 C34 C37 C40: library part "CAP 0402", "Ceramic Capacitor 1nF ±5% 50V NP0 0402", Manufacturer=Murata, Package=0402, Tolerance=±5%, Voltage=50V, Manufacturer P/N=GRM1555C1H102JA01D, Tr=-55:125
C44 C45: library part "CAP 0402", "Ceramic Capacitor 6pF ±0.25pF 50V NP0 RF 0402", Manufacturer=Murata, Package=0402, Tolerance=±0.25pF, Voltage=50V, Manufacturer P/N=GJM1555C1H6R0CB01D, Tr=-55:125
C54 C65: library part CAP, "Ceramic Capacitor 10nF ±10% 50V X7R 0402", Manufacturer=Murata, Package=0402, Tolerance=±10%, Voltage=50V, Manufacturer P/N=GRM155R71H103KA88, Tr=-55:125
C64: library part CAP, "Ceramic Capacitor 22uF ±10% 25V X7R 1210", Manufacturer=Murata, Package=1210, Tolerance=±10%, Voltage=25V, Manufacturer P/N=GRM32ER71E226KE15, Tr=-55:125
D1 D3 D6: library part LED0603RD, "LED, SMT 0603, Color Red, 5mA, 1.85V", Manufacturer=Panasonic, Package="0603 Polarized", Manufacturer P/N=LNJ237W82RA
D2: library part LED0603GR, "LED, SMT 0603, Color Blue, 5mA, 2.9V", Manufacturer=Panasonic, Package="0603 Polarized", Manufacturer P/N=LNJ937W8CRA
D4: library part LED0603Y, "LED, SMT 0603, Color Amber, 10mA, 2.05V", Manufacturer=Panasonic, Package="0603 Polarized", Manufacturer P/N=LNJ412K84RA
D5: library part LED0603GR, "LED, SMT 0603, Color Green, 10mA, 2.05V", Manufacturer=Panasonic, Package="0603 Polarized", Manufacturer P/N=LNJ326W83RA
J1: "Male Header, 0.050\" Pitch, 2x5 Position", Manufacturer=Sullins, Manufacturer P/N=GRPB052VWVN
L1: library part "IND 0402", "Ferrite Bead 100-Ohm @ 100MHz 2A 0603", Manufacturer=Murata, Manufacturer P/N=BLM18EG101TN1, Package=0603, Tolerance=±25%, Tr=-55:125
L2 L4 L5: library part "IND 0402", "Ferrite Bead 600-Ohm @ 100MHz 900mA 0402", Manufacturer=Murata, Package=0402, Tolerance=±25%, Manufacturer P/N=BLM15PX601SN1D, Tr=-55:125
L3: library part INDUCTOR, "4.7uH Inductor 750mA 260mOhm 0805", Manufacturer=Samsung, Manufacturer P/N=CIG21L4R7MNE
L6: library part COIL, "Wirewound Inductor 2.2uH +/-20% 3.5A SMD", Manufacturer=Coilcraft, I(sat)=3.5, Manufacturer P/N=XFL4020-222ME
P1: library part "Header 6X2H", "Header, 6-Pin, Dual row, Right Angle", Manufacturer=Sullins, Manufacturer P/N=PEC06DBAN
P2: library part TBD, "Header, 6-Pin, Single row, Vertical", Manufacturer=JST, Manufacturer P/N=B6B-ZR
P3: "Top Entry Shrouded Connector; 12-position", Manufacturer=JST, Manufacturer P/N=BM12B-GHS-TBT
P4: "USB 3.0 Standard-A Receptacle Right-Angle", Manufacturer=FCI, Manufacturer P/N=10117835-001LF
P5: "1.27mm pitch SIM Card Holder", Manufacturer=Molex, Manufacturer P/N=47553-2001
P6: "Micro SD Card Slot 8-pin Push-In Push-Out", Manufacturer=Amphenol, Manufacturer P/N=101-00581-59
P7 P8: "Ultra Miniature Coaxial Jack, 50 Ohms", Manufacturer=Hirose, Manufacturer P/N=U.FL-R-SMT(10)
P9: "2.5mm pitch 5-position", Manufacturer=JST, Manufacturer P/N=B5B-XH-A
Q1 Q2 Q3: "NPN Small Signal Transistor SMD SOT-23", Manufacturer="Diodes, Inc.", Manufacturer P/N=MMBT4401-7-F
R1 R2 R21 R22 R23 R24 R31 R37: library part RES, "Thick Film Resistor 47k ±1% 0.1W 75V 0402", Manufacturer=Panasonic, Package=0402, Power=0.1, Tolerance=±1%, Voltage=75, Manufacturer P/N=ERJ-2RKF4702X, Tcr=±100, Tr=-55:155
R3 R4 R7 R8: library part RES, "Thick Film Resistor 1k ±1% 0.1W 75V 0402", Manufacturer=Panasonic, Package=0402, Power=0.1, Tolerance=±1%, Voltage=75, Manufacturer P/N=ERJ-2RKF1001X, Tcr=±100, Tr=-55:155
R5 R6 R18 R19 R26 R27 R30 R32 R33 R34 R35 R65 R68: library part "RES 0402", "Thick Film Resistor 20 ±1% 0402", Manufacturer=Yageo, Package=0402, Tolerance=±1%, Manufacturer P/N=RC0402FR-0720L, Tr=-55:155
  R30: Do Not Place=DNP
R9 R10 R11 R12 R15 R16 R25 R38 R39 R42 R43: library part RES, "Thick Film Resistor 240 ±1% 0.1W 75V 0402", Manufacturer=Panasonic, Package=0402, Power=0.1, Tolerance=±1%, Voltage=75, Manufacturer P/N=ERJ-2RKF2400X, Tcr=±100, Tr=-55:155
R13 R14 R17: library part RES, "Solder Link", Do Not Place=DNP
R20 R28 R36: library part RES, "Thick Film Resistor 10k ±1% 0.1W 75V 0402", Manufacturer=Panasonic, Package=0402, Power=0.1, Tolerance=±1%, Voltage=75, Manufacturer P/N=ERJ-2RKF1002X, Tcr=±100, Tr=-55:155
R29 R57 R58 R59 R60 R61 R62 R63 R64 R67: library part RES, "Thick Film Resistor 4.7k ±1% 0.1W 75V 0402", Manufacturer=Panasonic, Package=0402, Power=0.1, Tolerance=±1%, Voltage=75, Manufacturer P/N=ERJ-2RKF4701X, Tcr=±100, Tr=-55:155
R40 R41 R44 R45 R46 R47 R48 R49 R50 R51 R52 R53 R54 R55: library part RES, "Thick Film Resistor 20 ±1% 0.1W 75V 0402", Manufacturer=Panasonic, Package=0402, Power=0.1, Tolerance=±1%, Voltage=75, Manufacturer P/N=ERJ-2RKF20R0X, Tcr=±100, Tr=-55:155
R56: library part RES, "Thick Film Resistor 1.5k ±1% 0.1W 75V 0402", Manufacturer=Panasonic, Package=0402, Power=0.1, Tolerance=±1%, Voltage=75, Manufacturer P/N=ERJ-2RKF1501X, Tcr=±100, Tr=-55:155
R66: library part RES, "Thick Film Resistor 2.49k ±1% 0.1W 75V 0402", Manufacturer=Panasonic, Package=0402, Power=0.1, Tolerance=±1%, Voltage=75, Manufacturer P/N=ERJ-2RKF2491X, Tcr=±100, Tr=-55:155
R69: library part RES, "Thin Film Resistor 31.6k ±0.1% 0.125W 100V 0805", Manufacturer=Panasonic, Package=0805, Power=0.125, Tolerance=±0.1%, Voltage=100, Manufacturer P/N=ERA-6AEB3162V, Tcr=±25, Tr=-55:155
R70: library part RES, "Thin Film Resistor 10k ±0.1% 0.125W 100V 0805", Manufacturer=Panasonic, Package=0805, Power=0.125, Tolerance=±0.1%, Voltage=100, Manufacturer P/N=ERA-6AEB103V, Tcr=±25, Tr=-55:155
R71: library part RES, "Thick Film Resistor 1k ±1% 0.1W 50V 0402", Manufacturer=Panasonic, Package=0402, Power=0.1, Tolerance=±1%, Voltage=50, Manufacturer P/N=ERJ-2RKF1001X, Tcr=±100, Tr=-55:155
S1 S2 S3: "Tactile Switch; Normally Open", Manufacturer=Panasonic, Manufacturer P/N=EVQ-PF006K
TP1: "Test Point SMD"
U1 U3: "4-Lane TVS Diode Array", Manufacturer="On Semiconductor", Manufacturer P/N=NUP4301MR6
U2: Manufacturer=Telit, Manufacturer P/N=LE910NAG703T701
U4 U6 U11: "Ultra-small 1.5A High-Side Load Switch", Manufacturer=Silego, Manufacturer P/N=SLG59M1440V
U5: library part ARTIK_LGA_PAD_10, "ARTIK 710 System on Module", Manufacturer=Samsung, Manufacturer P/N="Artik 710"
U7: "4-Bit Dual-Supply Bus Transceiver", Manufacturer="Texas Instruments", Manufacturer P/N=SN74AVC4T774RSVR
U8: library part CON_40P_6.5mm, "Gigabit Ethernet Transceiver", Manufacturer=Realtek, Manufacturer P/N=RTL8211E-VB-CG
U9 U10: library part ICMEF112P900MFR_5, "Ultra-low Capacitance TVS Diodes", Manufacturer="Alpha & Omega", Manufacturer P/N=AOZ8804
U12: "3-17V 3A Step-Down Converter VQFN", Manufacturer="Texas Instruments", Manufacturer P/N=TPS62130RGT
Y1: "CRYSTAL, 25.000MHz, 30ppm, 6pF", Freq=25.000MHz, Manufacturer=Murata, C=6pF, Manufacturer P/N=XRCGB25M000F3N00R0

## Via types
v1: diameter 25.98, hole 12.99, Top Layer to Bottom Layer, tented top, 1 vias

## Nets (pads, with @x,y where several pads share a name; then routed paths per layer and width w, separated by ;. In a path a pad name is that pad's centre, name@x,y a point inside that pad or via, vN(x,y) a via of type N, cw(c..) or ccw(c..) an arc to the next point about the centre after c; other vN are vias at no path point)
ANT_DIV: P7.1 U2.F1
ANTENNA: P8.1 U2.K1
AVCC1P0_GMAC: C43.2 C55.2 C56.2 C57.2 L2.2 U8.3 U8.9 U8.40
AVCC3P3_GMAC: C60.2 C61.2 L5.2 U8.6 U8.41
BT_PCM_CLK: 
BT_PCM_DIN: 
BT_PCM_DOUT: 
BT_PCM_LRCLK: 
CLK125: U8.46
GMAC_MDIO: R40.1 R56.2
GND: C1.1 C2.1 C3.2 C4.2 C5.2 C6.2 C7.1 C8.1 C9.1 C10.1 C11.1 C12.1 C13.1 C14.1 C15.1 C16.1 C17.1 C18.1 C19.1 C20.1 C21.2 C22.1 C23.1 C24.1 C25.1 C26.2 C27.1 C28.2 C29.1 C30.1 C31.1 C32.1 C33.1 C34.1 C35.1 C36.1 C37.1 C38.1 C39.1 C40.1 C41.1 C42.1 C43.1 C44.1 C45.1 C46.1 C47.1 C48.1 C49.1 C50.1 C51.1 C52.1 C53.1 C54.2 C55.1 C56.1 C57.1 C58.1 C59.1 C60.1 C61.1 C62.1 C63.1 C64.1 C65.2 D6.2 P1.11 P1.12 P2.1 P2.6 P3.13 P3.14 P4.4 P4.7 P4.10 P4.11 P5.C5 P5.D2 P5.T1 P5.T2 P6.6 P6.11 P7.2 P8.2 P9.4 P9.5 Q1.2 R3.2 R8.2 R18.1 R25.2 R28.2 R31.1 R37.1 R38.2 R39.2 R66.2 R67.1 R70.1 S1.1 S1.3 S2.1 S2.3 S3.1 S3.3 U1.2 U2.A2 U2.B13 U2.D4 U2.E1 U2.E2 U2.E14 U2.F2 U2.G1 U2.G2 U2.H1 U2.H2 U2.J1 U2.J2 U2.K2 U2.L1 U2.L2 U2.M3 U2.M4 U2.M12 U2.N3 U2.N4 U2.N5 U2.N6 U2.P3 U2.P4 U2.P5 U2.P6 U2.P8 U2.P9 U2.P10 U2.P13 U2.R2 U2.R3 U2.R4 U2.R5 U2.R6 U2.R8 U2.R10 U3.2 U4.4 U6.4 U7.1 U7.4 U7.5 U7.7 U7.8 U8.47 U8.49 U9.3 U9.8 U10.3 U10.8 U11.4 U12.6 U12.7 U12.8 U12.15 U12.16 U12.17
  other v1: 5216.53,5653.45
LED0_AD0: D4.2 U8.35
LED1_AD1: D5.2 U8.34
MDI0_C: P3.12
MDI0_N: P3.8
MDI0_P: P3.10
MDI1_C: P3.11
MDI1_N: P3.9
MDI1_P: P3.7
MDI2_C: P3.2
MDI2_N: P3.4
MDI2_P: P3.6
MDI3_C: P3.1
MDI3_N: P3.5
MDI3_P: P3.3
MDIP0_N: U8.2 U9.2 U9.9
MDIP0_P: U8.1 U9.1 U9.10
MDIP1_N: U8.5 U9.5 U9.6
MDIP1_P: U8.4 U9.4 U9.7
MDIP2_N: U8.8 U10.2 U10.9
MDIP2_P: U8.7 U10.1 U10.10
MDIP3_N: U8.11 U10.5 U10.6
MDIP3_P: U8.10 U10.4 U10.7
MICOM_INT: 
NetC1_2: C1.2 R1.1 R5.1 S1.2
NetC2_2: C2.2 R2.1 R6.1 S2.2
NetC65_1: C65.1 U12.9
NetD1_2: D1.2 R25.1
NetD2_2: D2.2 Q2.3
NetD3_2: D3.2 Q3.3
NetD4_1: D4.1 R42.2
NetD5_1: D5.1 R43.2
NetD6_1: D6.1 R71.1 U12.4
NetJ1_3: J1.3 R8.1
NetJ1_5: J1.5 R7.1
NetJ1_7: J1.7 R4.1
NetJ1_9: J1.9 R3.1
NetL3_1: L3.1 U8.48
NetL6_1: L6.1 U12.1 U12.2 U12.3
NetP1_3: P1.3 R9.2
NetP1_4: P1.4 R10.1
NetP1_5: P1.5 R11.2
NetP1_6: P1.6 R12.1
NetP1_7: P1.7 R13.1
NetP1_8: P1.8 R14.2
NetP2_2: P2.2 R15.1
NetP2_3: P2.3 R16.1
NetP6_9: P6.9 R26.2
NetP6_10: P6.10 R27.2
NetQ1_1: Q1.1 R36.1 R37.2
NetQ1_3: Q1.3 S3.2 U2.R12
NetQ2_2: Q2.2 R38.1
NetQ3_2: Q3.2 R39.1
NetR19_1: R19.1 U4.1
NetR29_1: R29.1 R30.1 U6.1
NetR31_2: R31.2 U2.B1
NetR32_1: R32.1 U7.11
NetR32_2: R32.2 U2.N15
NetR33_2: R33.2 U7.2
NetR34_1: R34.1 U7.10
NetR34_2: R34.2 U2.M15
NetR35_2: R35.2 U7.3
NetR40_2: R40.2 U8.31
NetR41_2: R41.2 U8.30
NetR44_2: R44.2 U8.19
NetR50_2: R50.2 U8.22
NetR51_2: R51.2 U8.27
NetR52_2: R52.2 U8.23
NetR53_2: R53.2 U8.24
NetR54_2: R54.2 U8.25
NetR55_2: R55.2 U8.26
NetR68_1: R68.1 U11.1
NetR69_1: R69.1 R70.2 U12.5
NetTP1_1: TP1.1 U2.R13
PHY_CT_A: C38.2 C39.2 C40.2
PHY_CT_B: C35.2 C36.2 C37.2
PHY_CT_C: C32.2 C33.2 C34.2
PHY_CT_D: C29.2 C30.2 C31.2
PME: R61.1 U8.33
PWR_MON: C20.2 C21.1 Q3.1 U2.R11 U7.13
RTL_nINT: R63.1 U8.20
RTL_nRST: R64.1 U8.29
RTL_RSET: R66.1 U8.39
RTL_XTAL1: C45.2 U8.42 Y1.1
RTL_XTAL2: C44.2 U8.43 Y1.3
RX0: R46.2 R57.1 U8.14
RX1: R47.2 R58.1 U8.16
RX2: R48.2 R59.1 U8.17
RX3: R49.2 R60.1 U8.18
RXDLY: R62.1 U8.32
RXDV: R45.2 R67.2 U8.13
SIMCLK: C4.1 P5.C3 U2.A6
SIMIN: P5.D1 U2.A4
SIMIO: C3.1 P5.C7 U2.A5
SIMRST: C5.1 P5.C2 U2.A7
SIMVCC: C6.1 C7.2 P5.C1 U2.A3
STAT_LED: Q2.1 U2.C8
SWREG_EN: R65.2 U8.38
V3V3: C22.2 C23.2 C24.2 C25.2 C26.1 C62.2 C63.2 D2.1 D3.1 L1.1 L6.2 P6.4 R1.2 R2.2 R4.2 R7.2 R17.1 R26.1 R29.2 R42.1 R43.1 R56.1 R57.2 R58.2 R59.2 R60.2 R61.2 R62.2 R63.2 R64.2 R65.1 R69.2 U1.5 U7.6 U7.14 U7.15 U7.16 U11.2 U12.14
V3V3_CELL: C27.2 C28.1 L1.2 U2.M1 U2.M2 U2.N1 U2.N2 U2.P1 U2.P2
V3V3_ETH: C49.2 C50.2 C51.2 C52.2 C53.2 C54.1 L4.1 L5.1 U8.44 U8.45 U11.3
V5: C8.2 C9.2 C10.2 C11.2 C12.2 C13.2 C14.2 C15.2 C16.2 C17.2 C64.2 P2.4 P9.1 P9.2 R13.2 R14.1 R71.2 U4.2 U6.2 U12.10 U12.11 U12.12 U12.13
V5_USB_CELL: C18.2 C19.2 U2.A13 U6.3
VCC1P0_GMACOUT: C41.2 C42.2 C58.2 C59.2 L2.1 L3.2 U8.28 U8.36
VCC3P3_GMAC: C46.2 C47.2 C48.2 L4.2 U8.15 U8.21 U8.37
VCC3P3_SYS: D1.1 R20.1 R21.2 R22.2 R23.2 R24.2
XADC0: 
XADC1: 
XADC2: 
XADC3: 
XADC4: 
XADC5: 
XAGPIO0: 
XAUDIO_I2S0_CDCLK: 
XAUDIO_I2S0_DIN: 
XAUDIO_I2S0_DOUT: 
XAUDIO_I2S0_LRCLK: 
XAUDIO_I2S0_SCLK: 
XAUDIO_IRQ: 
XAUDIO_SCL: 
XAUDIO_SDA: 
XBASE_PWRON: R68.2
XBOOT_CONFIG0: J1.10
XBOOT_CONFIG1: J1.8
XBOOT_CONFIG2: J1.6
XBOOT_CONFIG3: J1.4
XCAM_LDO_EN: 
XCAM_RESET: 
XCAM_SCL: 
XCAM_SDA: 
XCAM_STBY: 
XCHG_INT: 
XCHG_SCL: 
XCHG_SDA: 
XDEBUG_RXD: R12.2 U1.4
XDEBUG_TXD: R10.2 U1.6
XFUEL_SCL: 
XFUEL_SDA: 
XGMAC_MDC: R41.1
XGMAC_RXCLK: R44.1
XGMAC_RXCTL: R45.1
XGMAC_RXD0: R46.1
XGMAC_RXD1: R47.1
XGMAC_RXD2: R48.1
XGMAC_RXD3: R49.1
XGMAC_TXCLK: R50.1
XGMAC_TXCTL: R51.1
XGMAC_TXD0: R52.1
XGMAC_TXD1: R53.1
XGMAC_TXD2: R54.1
XGMAC_TXD3: R55.1
XGPIO0: 
XGPIO1: 
XGPIO2: 
XGPIO3: 
XGPIO4: 
XGPIO5: 
XGPIO6: 
XGPIO7: 
XGPIO8: 
XGPIO9: 
XHDMI_CEC: 
XHDMI_HPD: 
XHDMI_LS_OE: 
XHDMI_SCL: 
XHDMI_SDA: 
XHDMI_TX0N: 
XHDMI_TX0P: 
XHDMI_TX1N: 
XHDMI_TX1P: 
XHDMI_TX2N: 
XHDMI_TX2P: 
XHDMI_TXCN: 
XHDMI_TXCP: 
XHSIC_DATA: 
XHSIC_HUB_CONNECT: 
XHSIC_HUB_INT: 
XHSIC_HUB_RST: 
XHSIC_HUB_SCL: R33.1
XHSIC_HUB_SDA: R35.1
XHSIC_STROBE: 
XI2C0_SCL: 
XI2C0_SDA: 
XJTAG_RSTN: 
XJTAG_TCK: 
XJTAG_TDI: 
XJTAG_TDO: 
XJTAG_TMS: 
XLCD1_GPIO1: 
XLCD2_GPIO1: 
XLCD_GPIO: R36.2
XLCD_PWMOUT: 
XLCD_RESET: 
XLED1_IN: 
XLED1_OUT: 
XLED2_IN: 
XLED2_OUT: 
XLVDS_DN0: 
XLVDS_DN1: 
XLVDS_DN2: 
XLVDS_DN3: 
XLVDS_DN4: 
XLVDS_DNCLK: 
XLVDS_DP0: 
XLVDS_DP1: 
XLVDS_DP2: 
XLVDS_DP3: 
XLVDS_DP4: 
XLVDS_DPCLK: 
XMCU_SCL: 
XMCU_SDA: 
XMIPICSI1_DN0: 
XMIPICSI1_DN1: 
XMIPICSI1_DN2: 
XMIPICSI1_DN3: 
XMIPICSI1_DNCLK: 
XMIPICSI1_DP0: 
XMIPICSI1_DP1: 
XMIPICSI1_DP2: 
XMIPICSI1_DP3: 
XMIPICSI1_DPCLK: 
XMIPIDSI1_DN0: 
XMIPIDSI1_DN1: 
XMIPIDSI1_DN2: 
XMIPIDSI1_DN3: 
XMIPIDSI1_DNCLK: 
XMIPIDSI1_DP0: 
XMIPIDSI1_DP1: 
XMIPIDSI1_DP2: 
XMIPIDSI1_DP3: 
XMIPIDSI1_DPCLK: 
XPWM0_OUT: 
XPWR_KEY: R5.2
XRESET: R6.2
XRTC_INT: 
XRTC_SCL: 
XRTC_SDA: 
XSD0_CDN: R27.1 R28.1
XSD0_CLK: P6.5
XSD0_CMD: P6.3 R20.2
XSD0_D0: P6.7 R23.1
XSD0_D1: P6.8 R24.1
XSD0_D2: P6.1 R21.1 R22.1
XSD0_D3: P6.2
XSPI0_CLK: 
XSPI0_CS: 
XSPI0_MISO: 
XSPI0_MOSI: 
XTSP1_GPIO1: 
XTSP1_INT: 
XTSP2_GPIO1: 
XTSP2_INT: 
XTSP_RESET: 
XTSP_SCL: 
XTSP_SDA: 
XUART0_TX: R9.1 R11.1 R15.2 R16.2 U1.1 U1.3
XUHOST1_DM: U2.C15
XUHOST1_DP: U2.B15
XUHOST_VBUSCTRL: R30.2
XUSB3_DM: P4.2 U3.1
XUSB3_DP: P4.3 U3.3
XUSB3_ID: R17.2 R18.2
XUSB3_VBUS: P4.1 U3.5 U4.3
XUSB3_VBUSCTRL: R19.2
ZB_JTCK: 
ZB_JTDI: 
ZB_JTDO: 
ZB_JTMS: 
ZB_PA4: 
ZB_PA5: 
ZB_PC0: 
ZB_RSTN: 
pads on no net: J1.1 J1.2 P1.1 P1.2 P1.9 P1.10 P2.5 P4.5 P4.6 P4.8 P4.9 P5. P5.C6 P9.3 U2.A8 U2.A9 U2.A10 U2.A11 U2.A12 U2.A14 U2.B2 U2.B3 U2.B4 U2.B5 U2.B6 U2.B7 U2.B8 U2.B9 U2.B10 U2.B11 U2.B12 U2.B14 U2.C1 U2.C2 U2.C3 U2.C4 U2.C5 U2.C6 U2.C7 U2.C9 U2.C10 U2.C11 U2.C12 U2.C13 U2.C14 U2.D1 U2.D2 U2.D3 U2.D12 U2.D13 U2.D14 U2.D15 U2.E3 U2.E13 U2.E15 U2.F3 U2.F13 U2.F14 U2.F15 U2.G3 U2.G13 U2.G14 U2.G15 U2.H3 U2.H13 U2.H14 U2.H15 U2.J3 U2.J13 U2.J14 U2.J15 U2.K3 U2.K13 U2.K14 U2.K15 U2.L3 U2.L13 U2.L14 U2.L15 U2.M13 U2.M14 U2.N7 U2.N8 U2.N9 U2.N10 U2.N11 U2.N12 U2.N13 U2.N14 U2.P7 U2.P11 U2.P12 U2.P14 U2.P15 U2.R7 U2.R9 U2.R14 U3.4 U3.6 U7.9 U7.12 U8.12 Y1.2 Y1.4

## Silkscreen, mask and mechanical layers (free items; w line width, h text height)
Mechanical 2:
  the board outline again, w20
Mechanical 10:
  text "1. FRONT ASSEMBLY NOTE #1" at 2100,5200 h45
Mechanical 11:
  text "1. FRONT CONFORMAL COAT NOTE #1" at 2100,5200 h45
Mechanical 16:
  lines w5: -2283.46,-119.09 -2083.46,-119.09 ; -2283.46,2005.91 -2083.46,2005.91 ; -2283.46,4130.91 -2083.46,4130.91 ; 466.54,-2244.09 466.54,-2044.09 ; 466.54,6055.91 466.54,6255.91 ; 1216.54,-2044.09 1216.54,-844.09 2616.54,-844.09 ; 1216.54,-1204.09 2616.54,-1204.09 ; 1266.54,-1334.09 1666.54,-1334.09 ; 1481.54,-1614.09 1511.54,-1614.09 ; 1481.54,-1589.09 1511.54,-1589.09 ; 1481.54,-1514.09 1511.54,-1514.09 ; 1481.54,-1489.09 1511.54,-1489.09 ; 1481.54,-1414.09 1511.54,-1414.09 ; 1481.54,-1389.09 1511.54,-1389.09 ; 3216.54,-2244.09 3216.54,-2044.09 ; 3216.54,6055.91 3216.54,6255.91 ; 4016.54,-1744.09 8516.54,-1744.09 ; 4016.54,-1444.09 8516.54,-1444.09 ; 4016.54,-1144.09 5516.54,-1144.09 ; 4016.54,5655.91 8516.54,5655.91 ; 4016.54,5855.91 8516.54,5855.91 ; 4016.54,6055.91 4016.54,5455.91 8516.54,5455.91 ; 4616.54,5455.91 4616.54,6055.91 ; 5116.54,5455.91 5116.54,6055.91 ; 5516.54,-2044.09 5516.54,-1444.09 5516.54,-844.09 ; 5966.54,-2244.09 5966.54,-2044.09 ; 5966.54,6055.91 5966.54,6255.91 ; 7616.54,-2044.09 7616.54,-1444.09 ; 7891.54,5455.91 7891.54,6055.91 ; 8516.54,-119.09 8716.54,-119.09 ; 8516.54,2005.91 8716.54,2005.91 ; 8516.54,4130.91 8716.54,4130.91 ; 2616.54,-844.09 4016.54,-844.09 ; 2616.54,-844.09 2616.54,-2044.09 4016.54,-2044.09 ; 4016.54,-2044.09 8516.54,-2044.09 ; 4016.54,-2044.09 4016.54,-844.09 ; 4016.54,-844.09 5516.54,-844.09 ; 5516.54,-844.09 8516.54,-844.09 8516.54,-2044.09 ; 8516.54,-2044.09 -2083.46,-2044.09 -2083.46,6055.91 8516.54,6055.91 8516.54,-2044.09 ; -2283.46,-2244.09 8716.54,-2244.09 8716.54,6255.91 -2283.46,6255.91 -2283.46,-2244.09
  lines w7: 1496.54,-1604.09 1496.54,-1574.09 ; 1496.54,-1504.09 1496.54,-1474.09 ; 1496.54,-1404.09 1496.54,-1374.09
  text "1" at -932.13,6120.91 h70
  text "2" at 1818.54,6120.91 h70
  text "3" at 4563.54,6120.91 h70
  text "4" at 7314.55,6120.91 h70
  text "REV" at 4066.54,5905.91 h66.93
  text "DATE" at 4666.54,5905.91 h66.93
  text "DESC" at 5166.54,5905.91 h66.93
  text "ENG" at 7966.54,5905.91 h66.93
  text "1" at 4066.54,5705.91 h66.93
  text "*" at 4666.54,5705.91 h66.93
  text "INITIAL RELEASE" at 5166.54,5705.91 h66.93
  text "*" at 7966.54,5705.91 h66.93
  text "A" at -2208.46,5102.91 h70
  text "A" at 8591.54,5102.91 h70
  text "B" at -2208.46,2977.91 h70
  text "B" at 8591.54,2977.91 h70
  text "C" at -2208.46,852.91 h70
  text "C" at 8591.54,852.91 h70
  text "ENGINEER:" at 4066.54,-944.09 h45
  text "TITLE:" at 5566.54,-944.09 h45
  text "Signal Laboratories, Inc." at 2716.54,-984.25 h70
  text "ALL DIMENSIONS ARE IN MM (INCHES)" at 1291.54,-1019.09 h47.24
  text "*" at 4066.54,-1069.09 h70
  text "3479 Edison Way" at 2716.54,-1181.1 h70
  text "TOLERANCES:" at 1726.54,-1184.09 h47.24
  text "*" at 5591.54,-1219.09 h86.61
  text "PCB DESIGNER:" at 4066.54,-1239.09 h45
  text "D" at -2208.46,-1267.09 h70
  text "D" at 8591.54,-1267.09 h70
  text "DECIMALS" at 1291.54,-1294.09 h47.24
  text "*" at 4066.54,-1369.09 h70
  text "Menlo Park CA 94025" at 2716.54,-1377.95 h70
  text ".X     0.1" at 1291.54,-1419.09 h47.24
  text ".XX    0.05" at 1291.54,-1519.09 h47.24
  text "DATE:" at 4066.54,-1544.09 h45
  text "PART NO.:" at 5566.54,-1544.09 h45
  text "REV:" at 7666.54,-1544.09 h45
  text "(877) 778-8435" at 2716.54,-1574.8 h70
  text ".XXX   0.005" at 1291.54,-1619.09 h47.24
  text "*" at 4066.54,-1669.09 h66.93
  text "-" at 5566.54,-1669.09 h70
  text "1" at 7666.54,-1669.09 h70
  text "siglabs.com" at 2716.54,-1771.65 h70
  text "*UNLESS OTHERWISE NOTED" at 1266.54,-1844.09 h47.24
  text "FILE NAME:" at 4066.54,-1844.09 h45
  text "DWG NO:" at 5566.54,-1844.09 h45
  text "SCALE:" at 7666.54,-1844.09 h45
  text ".PCB_FILE_NAME_NO_PATH" at 4116.54,-1964.09 h70
  text "-" at 5566.54,-1969.09 h70
  text "1:1" at 7666.54,-1969.09 h70
  text "1" at -932.13,-2179.09 h70
  text "2" at 1818.54,-2179.09 h70
  text "3" at 4563.54,-2179.09 h70
  text "4" at 7314.55,-2179.09 h70
Drill Drawing:
  text "1. LEAD-FREE HASL" at 2100,5200 h45
  text "2. SOLDERMASK: GREEN" at 2100,5100 h45
  text "3. SILKSCREEN: WHITE" at 2100,5000 h45
  text ".Legend" at 4025,4400 h47.24
Mechanical 26:
  text "1. BOTTOM ASSEMBLY NOTE #1" at 4000,5300 h45
Mechanical 27:
  text "1. BOTTOM CONFORMAL COAT NOTE #1" at 4000,5225 h45
Mechanical 32:
  lines w5: -2283.46,-119.09 -2083.46,-119.09 ; -2283.46,2005.91 -2083.46,2005.91 ; -2283.46,4130.91 -2083.46,4130.91 ; -2083.46,-1744.09 2416.54,-1744.09 ; -2083.46,-1444.09 2416.54,-1444.09 ; -2083.46,5455.91 2416.54,5455.91 2416.54,6055.91 ; -2083.46,5655.91 2416.54,5655.91 ; -2083.46,5855.91 2416.54,5855.91 ; -1458.46,5455.91 -1458.46,6055.91 ; -1183.46,-2044.09 -1183.46,-1444.09 ; 466.54,-2244.09 466.54,-2044.09 ; 466.54,6055.91 466.54,6255.91 ; 916.54,-2044.09 916.54,-1444.09 916.54,-844.09 ; 916.54,-1144.09 2416.54,-1144.09 ; 1316.54,5455.91 1316.54,6055.91 ; 1816.54,5455.91 1816.54,6055.91 ; 3216.54,-2244.09 3216.54,-2044.09 ; 3216.54,6055.91 3216.54,6255.91 ; 3816.54,-1204.09 5216.54,-1204.09 ; 4766.54,-1334.09 5166.54,-1334.09 ; 4921.54,-1614.09 4951.54,-1614.09 ; 4921.54,-1589.09 4951.54,-1589.09 ; 4921.54,-1514.09 4951.54,-1514.09 ; 4921.54,-1489.09 4951.54,-1489.09 ; 4921.54,-1414.09 4951.54,-1414.09 ; 4921.54,-1389.09 4951.54,-1389.09 ; 5216.54,-2044.09 5216.54,-844.09 3816.54,-844.09 ; 5966.54,-2244.09 5966.54,-2044.09 ; 5966.54,6055.91 5966.54,6255.91 ; 8516.54,-119.09 8716.54,-119.09 ; 8516.54,2005.91 8716.54,2005.91 ; 8516.54,4130.91 8716.54,4130.91 ; -2083.46,-2044.09 2416.54,-2044.09 ; -2083.46,-2044.09 -2083.46,-844.09 916.54,-844.09 ; -2083.46,-2044.09 8516.54,-2044.09 8516.54,6055.91 -2083.46,6055.91 -2083.46,-2044.09 ; 916.54,-844.09 2416.54,-844.09 ; 2416.54,-2044.09 3816.54,-2044.09 3816.54,-844.09 ; 2416.54,-2044.09 2416.54,-844.09 ; 2416.54,-844.09 3816.54,-844.09 ; -2283.46,-2244.09 8716.54,-2244.09 8716.54,6255.91 -2283.46,6255.91 -2283.46,-2244.09
  lines w7: 4936.54,-1604.09 4936.54,-1574.09 ; 4936.54,-1504.09 4936.54,-1474.09 ; 4936.54,-1404.09 4936.54,-1374.09
  text "4" at -881.48,6120.91 h70
  text "3" at 1869.54,6120.91 h70
  text "2" at 4614.54,6120.91 h70
  text "1" at 7365.2,6120.91 h70
  text "ENG" at -1533.46,5905.91 h66.93
  text "DESC" at 1266.54,5905.91 h66.93
  text "DATE" at 1766.54,5905.91 h66.93
  text "REV" at 2366.54,5905.91 h66.93
  text "*" at -1533.46,5705.91 h66.93
  text "INITIAL RELEASE" at 1266.54,5705.91 h66.93
  text "*" at 1766.54,5705.91 h66.93
  text "1" at 2366.54,5705.91 h66.93
  text "A" at -2158.46,5102.91 h70
  text "A" at 8641.54,5102.91 h70
  text "B" at -2158.46,2977.91 h70
  text "B" at 8641.54,2977.91 h70
  text "C" at -2158.46,852.91 h70
  text "C" at 8641.54,852.91 h70
  text "TITLE:" at 866.54,-944.09 h45
  text "ENGINEER:" at 2366.54,-944.09 h45
  text "Signal Laboratories, Inc." at 3716.54,-984.25 h70
  text "ALL DIMENSIONS ARE IN MM (INCHES)" at 5141.54,-1019.09 h47.24
  text "*" at 2366.54,-1069.09 h70
  text "3479 Edison Way" at 3716.54,-1181.1 h70
  text "TOLERANCES:" at 4706.54,-1184.09 h47.24
  text "*" at 841.54,-1219.09 h86.61
  text "PCB DESIGNER:" at 2366.54,-1239.09 h45
  text "D" at -2158.46,-1267.09 h70
  text "D" at 8641.54,-1267.09 h70
  text "DECIMALS" at 5141.54,-1294.09 h47.24
  text "*" at 2366.54,-1369.09 h70
  text "Menlo Park CA 94025" at 3716.54,-1377.95 h70
  text ".X     0.1" at 5141.54,-1419.09 h47.24
  text ".XX    0.05" at 5141.54,-1519.09 h47.24
  text "REV:" at -1233.46,-1544.09 h45
  text "PART NO.:" at 866.54,-1544.09 h45
  text "DATE:" at 2366.54,-1544.09 h45
  text "(877) 778-8435" at 3716.54,-1574.8 h70
  text ".XXX   0.005" at 5141.54,-1619.09 h47.24
  text "1" at -1233.46,-1669.09 h70
  text "-" at 866.54,-1669.09 h70
  text "*" at 2366.54,-1669.09 h66.93
  text "siglabs.com" at 3716.54,-1771.65 h70
  text "SCALE:" at -1233.46,-1844.09 h45
  text "DWG NO:" at 866.54,-1844.09 h45
  text "FILE NAME:" at 2366.54,-1844.09 h45
  text "*UNLESS OTHERWISE NOTED" at 5166.54,-1844.09 h47.24
  text ".PCB_FILE_NAME_NO_PATH" at 2316.54,-1964.09 h70
  text "1:1" at -1233.46,-1969.09 h70
  text "-" at 866.54,-1969.09 h70
  text "4" at -881.48,-2179.09 h70
  text "3" at 1869.54,-2179.09 h70
  text "2" at 4614.54,-2179.09 h70
  text "1" at 7365.2,-2179.09 h70

## Text inside footprints (layer, text, board x,y; h text height)
D1: Top Overlay "-" at 4140.15,1273.13 h25; Top Overlay "+" at 4073.22,1277.07 h25
D2: Top Overlay "-" at 6140.15,4773.13 h25; Top Overlay "+" at 6073.22,4777.07 h25
D3: Top Overlay "-" at 6340.15,4773.13 h25; Top Overlay "+" at 6273.22,4777.07 h25
D4: Top Overlay "-" at 14640.15,5273.13 h25; Top Overlay "+" at 14573.22,5277.07 h25
D5: Top Overlay "-" at 14840.15,5273.13 h25; Top Overlay "+" at 14773.22,5277.07 h25
D6: Top Overlay "-" at 3140.15,5673.13 h25; Top Overlay "+" at 3073.22,5677.07 h25
P1: Top Overlay "12" at 3080,180 h50; Top Overlay "1" at 3120,80 h50; Top Overlay "1" at 3080,80 h50; Top Overlay "1" at 2380,80 h50; Top Overlay "2" at 2380,180 h50
P6: Mechanical 7 "can't confirm component outline" at 209.45,774.8 h3.94 r90; Mechanical 7 "pins #1-#8 can't confirm x-position  relative to four corner pads (shitty datasheet)" at 339.37,743.31 h3.94 r90